# Altium PCB bbr18_ball_sensor_board.PcbDoc
Units mm, origin at the board's own origin, x right, y up, seen from the top; angles counter-clockwise.
Board outline 44.8 x 54.86 mm, 2 copper layers (Top Layer, Bottom Layer), stack 1.571 mm thick; 5 components, 6 nets, 22 pads, 4 vias.
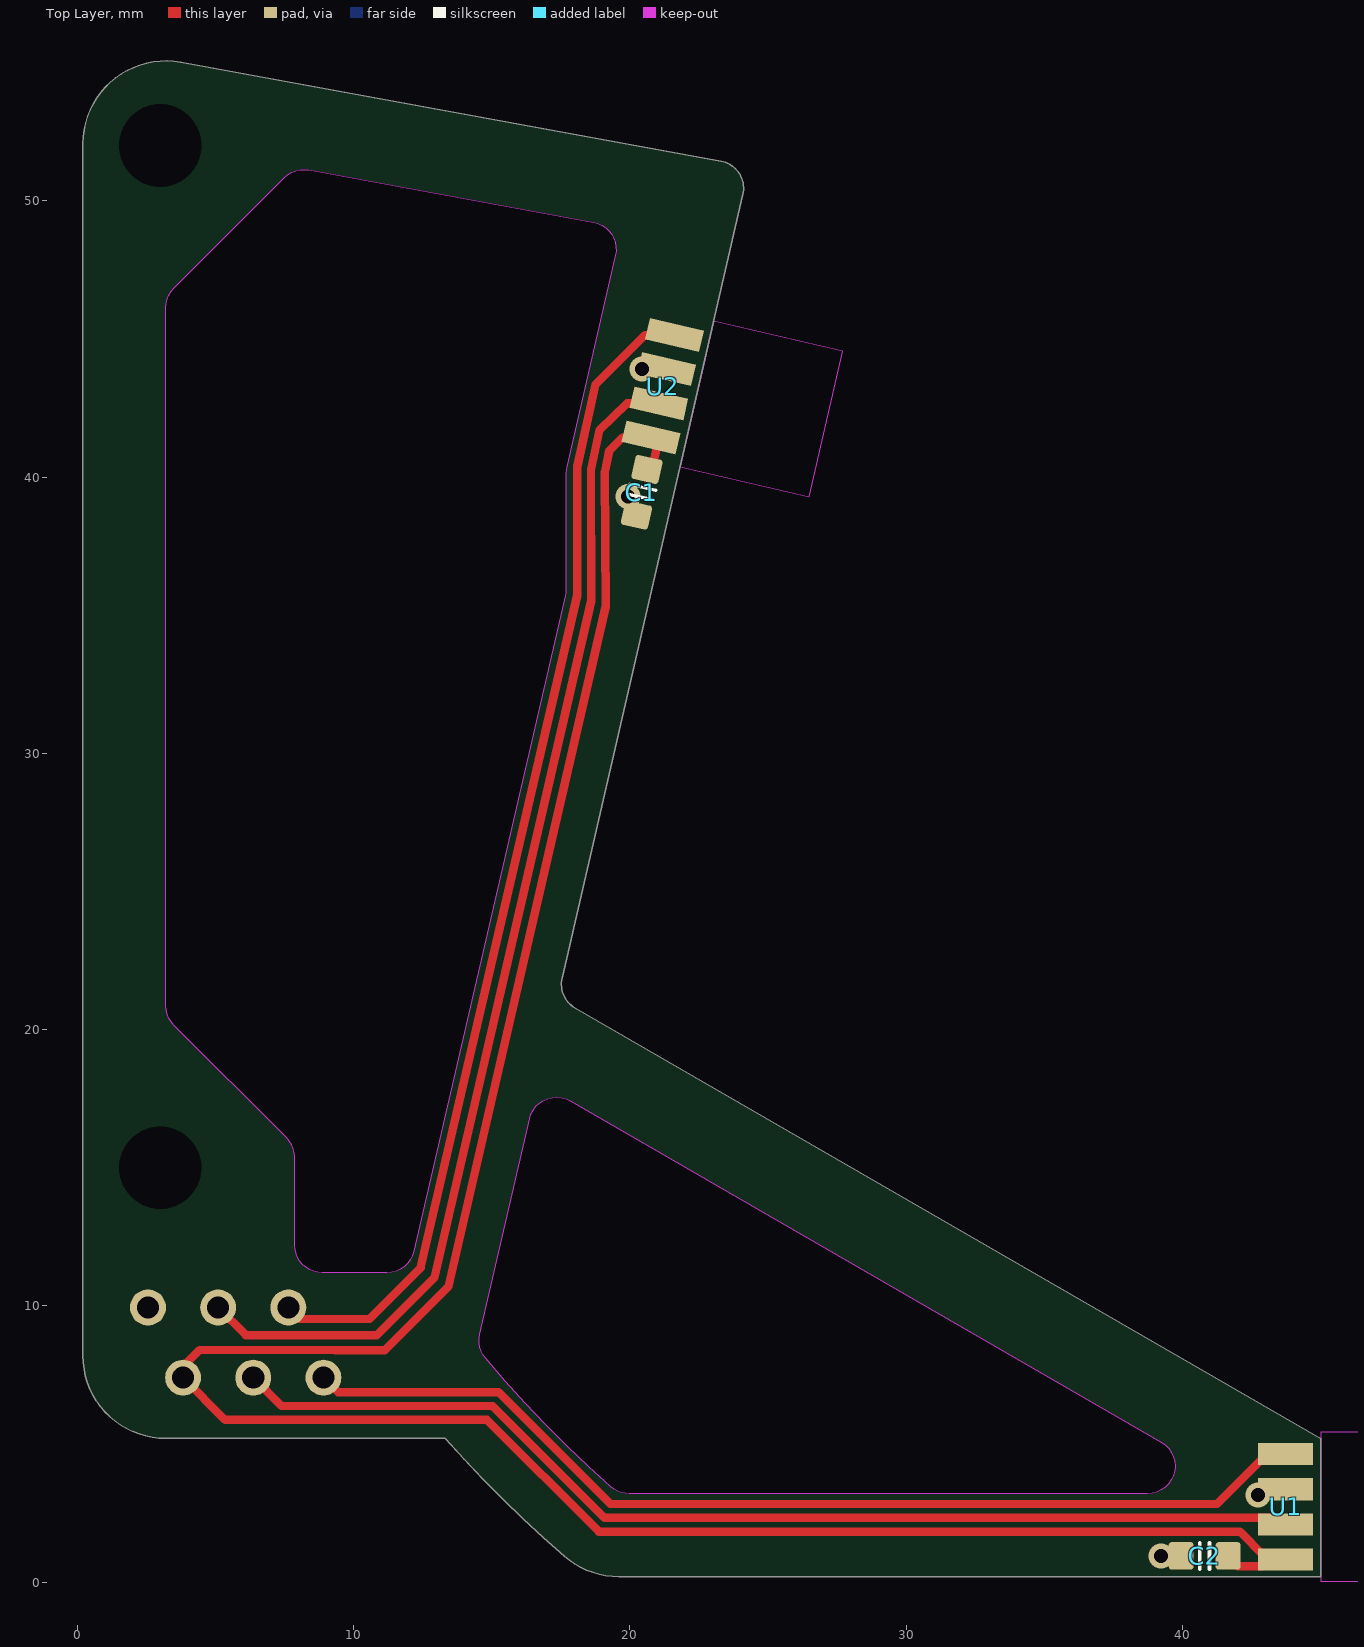
[diagram p0: Top Layer view]
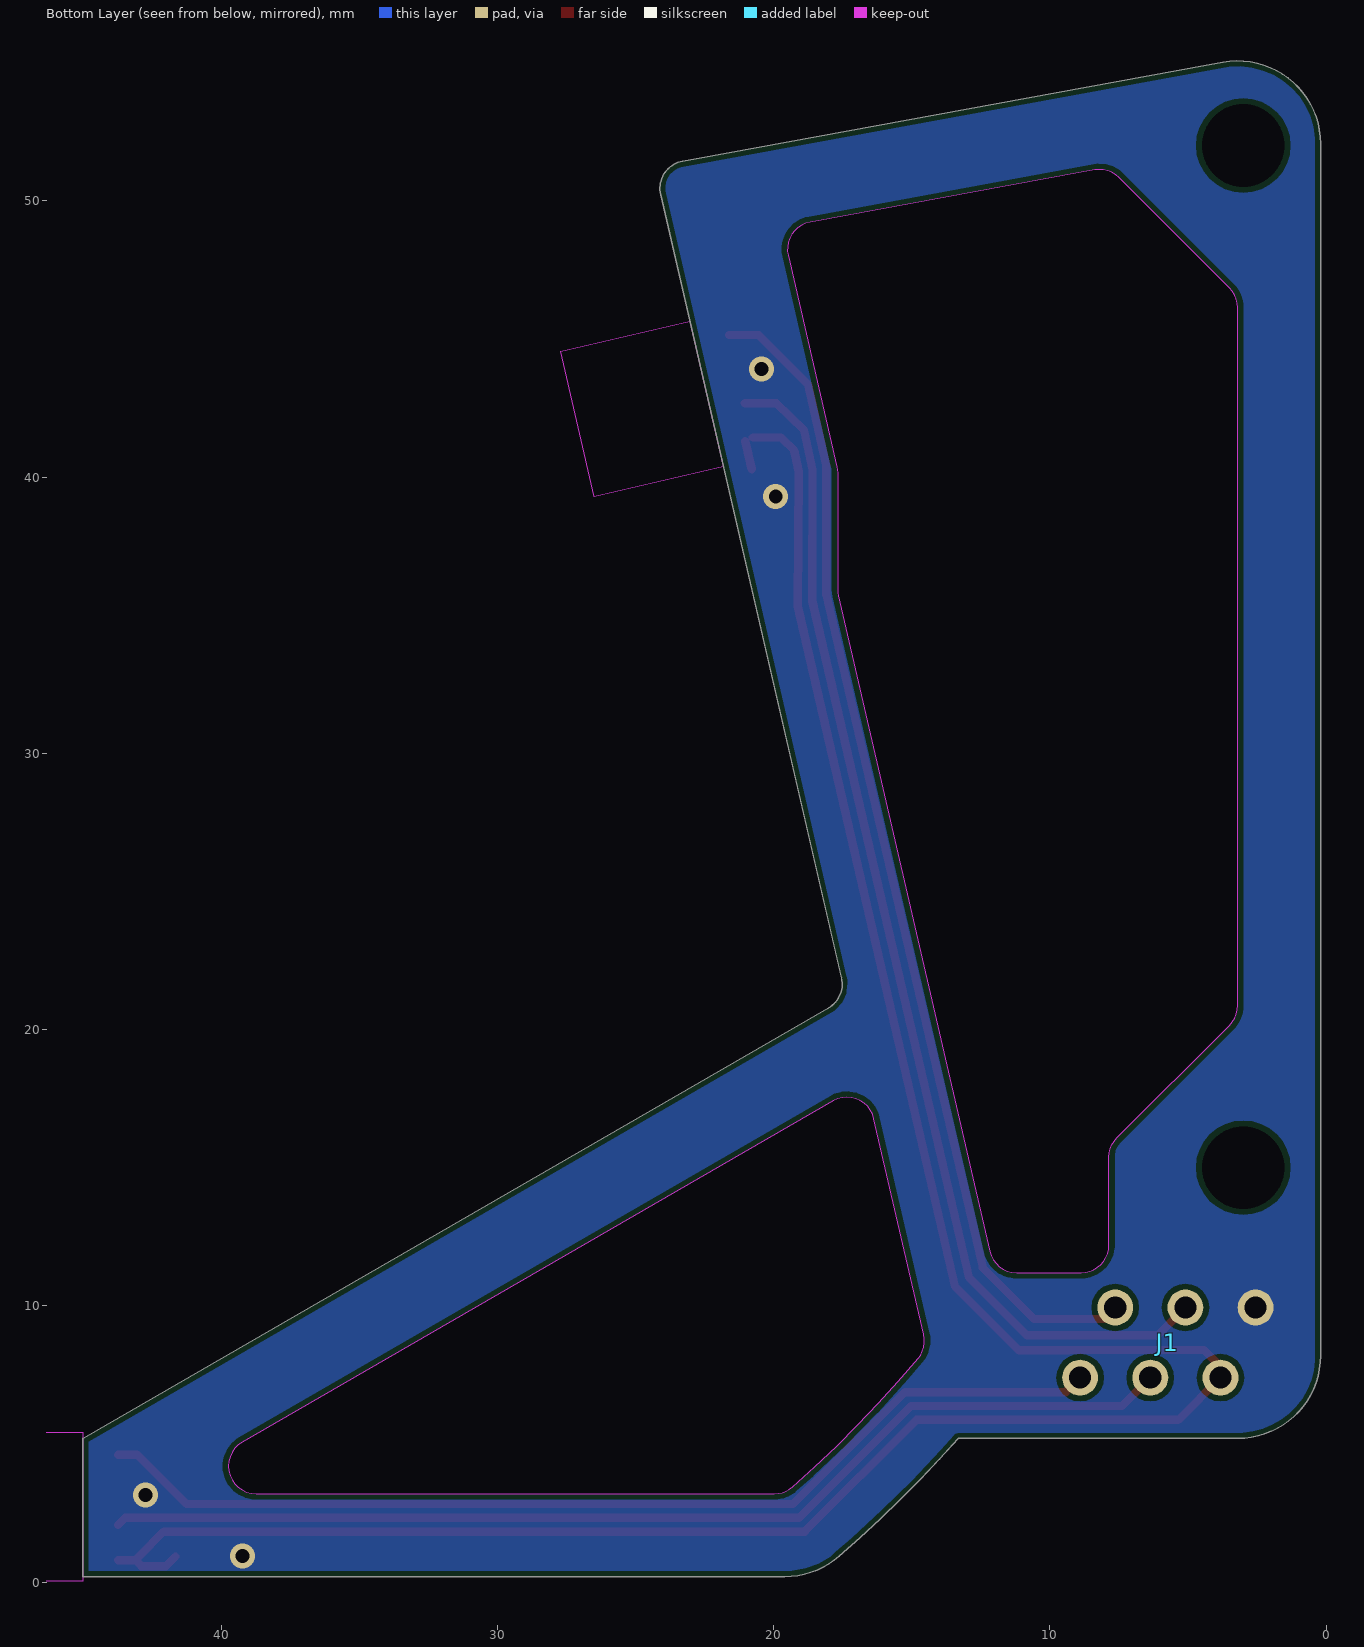
[diagram p1: Bottom Layer view, seen from below]
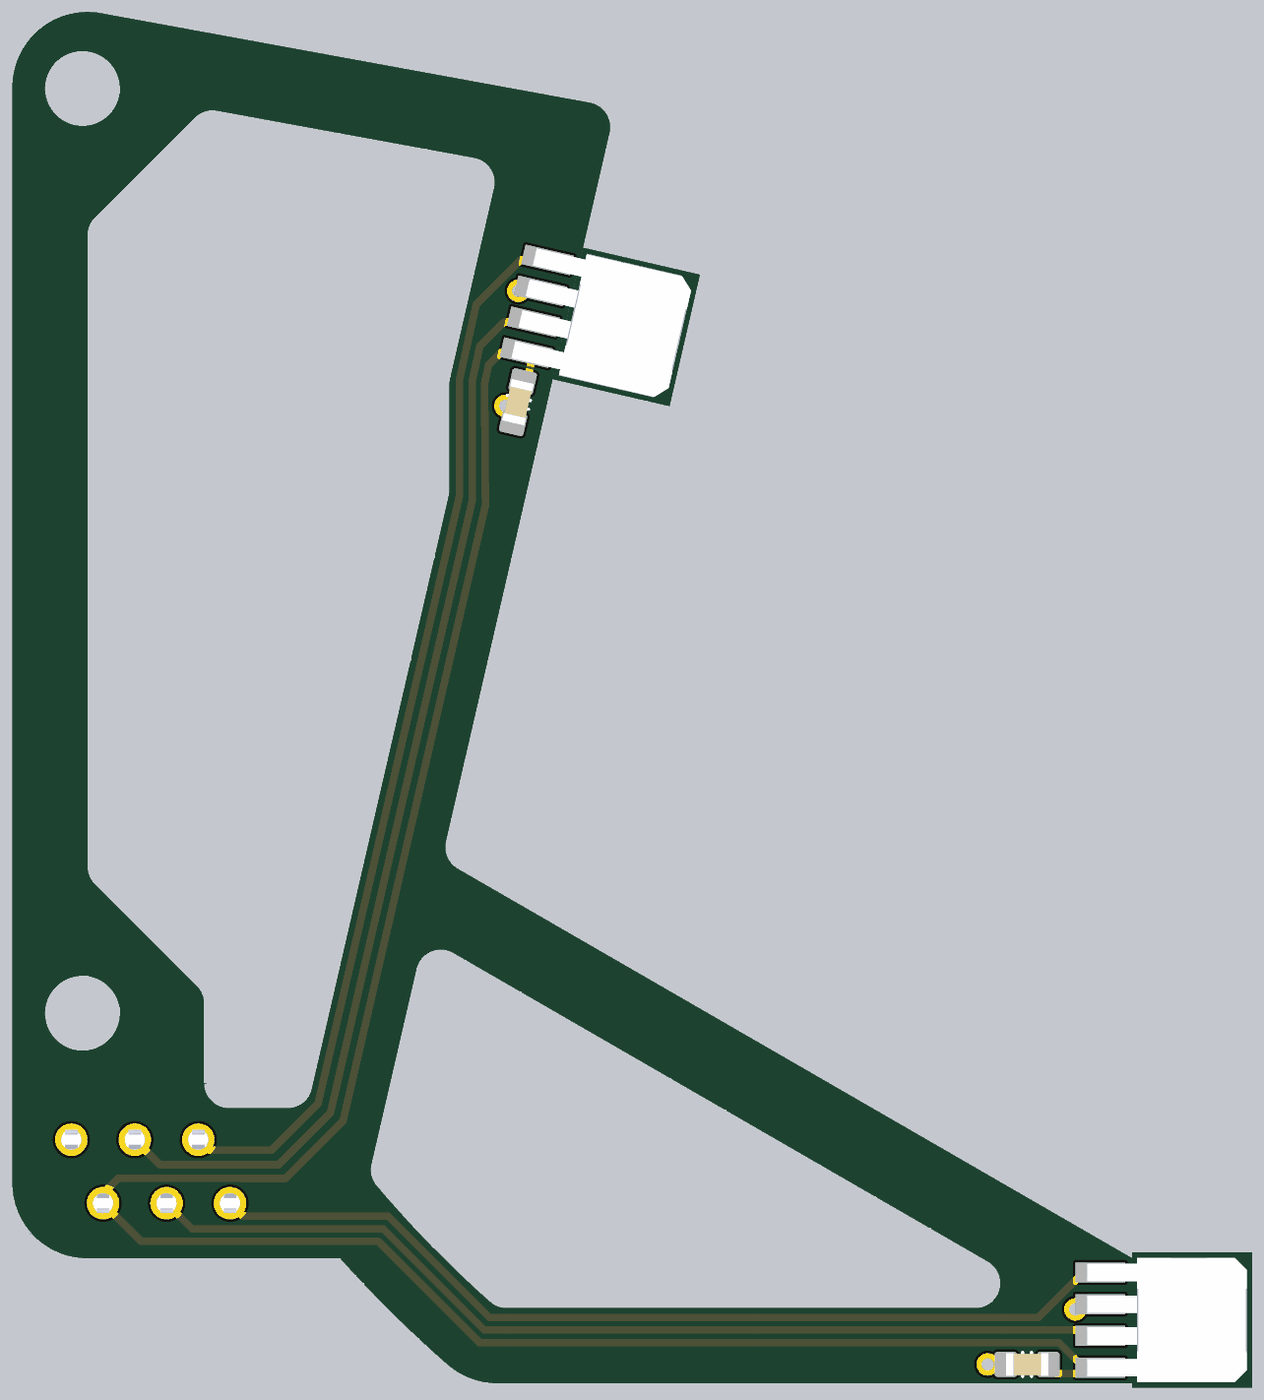
[diagram p2: 3D render of the assembled board from above, using the file's embedded part models]

## Layer stack, top to bottom
Top Solder: solder mask 0.0102, Solder Resist, Dk 3.5
Top Layer: signal copper 0.0356
Dielectric 1: dielectric 1.5, FR-4, Dk 4.8
Bottom Layer: signal copper 0.0356
Bottom Solder: solder mask 0.0102, Solder Resist, Dk 3.5

## Board outline
3.2,5.2 cw(c3.2,8.2) 0.2,8.2 0.2,52.061 cw(c3.2,52.061) 3.74,55.012 23.294,51.433 cw(c23.114,50.449) 24.088,50.224 17.542,21.87 ccw(c18.517,21.645) 18.017,20.779 45,5.2 45,0.2 19.596,0.2 cw(c19.596,3.2) 17.627,0.937 cw(c49,37) 13.312,5.2
cut-out: 14.773,8.094 cw(c15.537,8.739) 14.563,8.964 16.366,16.775 cw(c17.34,16.55) 17.84,17.416 39.232,5.066 cw(c38.732,4.2) 38.732,3.2 19.972,3.2 cw(c19.972,4.2) 19.31,3.451 cw(c49,37)
cut-out: 7.864,15.378 ccw(c6.864,15.378) 7.571,16.085 3.493,20.164 cw(c4.2,20.871) 3.2,20.871 3.2,46.129 cw(c4.2,46.129) 3.493,46.836 7.493,50.836 cw(c8.2,50.129) 8.38,51.113 18.68,49.228 cw(c18.5,48.244) 19.474,48.019 17.708,40.372 ccw(c18.683,40.147) 17.683,40.147 17.683,35.929 cw(c16.683,35.929) 17.657,35.704 12.179,11.975 cw(c11.205,12.2) 11.205,11.2 8.864,11.2 cw(c8.864,12.2) 7.864,12.2

## Design rules (kind name [scope] priority, off if disabled: settings)
BoardOutlineClearance [All] p1: gap=0.2 ignorepadtopadclearanceinfootprint=FALSE except(0: Arc-SplitContinuation Track-SplitContinuation SMDPad-SplitContinuation THPad-SplitContinuation Via-SplitContinuation Fill-SplitContinuation Poly-SplitContinuation Region-SplitContinuation Text-SplitContinuation)
Clearance ClearanceKeepOut [All vs OnLayer('Keep-Out Layer')] p1: gap=0.1 ignorepadtopadclearanceinfootprint=FALSE
Clearance [All] p2: gap=0.2 ignorepadtopadclearanceinfootprint=FALSE
ComponentClearance NetTieClearance [HasFootprint('NET-TIE-0602')] p1: gap=0 collisioncheckmode=3 verticalgap=0 showdistances=FALSE
ComponentClearance [All] p2: gap=0.2 collisioncheckmode=3 verticalgap=0.2 showdistances=FALSE
DiffPairsRouting [All] p1: maxlimit=0.3 minlimit=0.2 mostfreqgap=0.2 toplayer_minwidth=0.2 toplayer_maxwidth=1 toplayer_prefwidth=0.3 bottomlayer_minwidth=0.2 bottomlayer_maxwidth=1 bottomlayer_prefwidth=0.3 maxuncoupledlength=12.7
HoleSize [All] p1: absolutevalues=TRUE maxlimit=5 minlimit=0.3 maxpercent=80.000 minpercent=20.000
HoleToHoleClearance [All] p1: gap=0.2 allowstackedmicrovias=TRUE
MinimumSolderMaskSliver [All] p1: minsoldermaskwidth=0.2
PolygonConnect DirectConnectPolygons [All vs IsNamedPolygon('Power 16V') or IsNamedPolygon('Power GND') or IsNamedPolygon('Driver 16V') or InNet('SL_A') or InNet('SL_B') or InNet('SL_C') or InNet('MOT_A') or InNet('MOT_B') or InNet('MOT_C') or InNet('BAT_GND') or InNet('16V') or InNet('SLA_SHUNT') or InNet('SLB_SHUNT') or InNet('SLC_SHUNT')] p1: connectstyle=Direct reliefconductorwidth=0.254 reliefentries=4 polygonreliefangle="90 Angle" airgapwidth=0.254
PolygonConnect [All] p2: connectstyle=Direct reliefconductorwidth=0.254 reliefentries=4 polygonreliefangle="90 Angle" airgapwidth=0.254
RoomDefinition bbr18_ball_sensor_board [InComponentClass('bbr18_ball_sensor_board')] p1: confinementstyle=ConfineIn formatcopy=TRUE lockcomponents=FALSE outline -25.4,-25.4 72.15,-25.4 72.15,74.075 -25.4,74.075
RoutingVias [All] p1: holewidth=0.3 width=0.6 viastyle="Through Hole" minholewidth=0.3 minwidth=0.6 maxholewidth=2 maxwidth=3
SolderMaskExpansion SolderMaskExpansionVia [IsVia And (Not IsTestpoint)] p1: expansion=-5
SolderMaskExpansion [All] p2: expansion=0.1
Width [All] p1: maxlimit=5 minlimit=0.2 preferedwidth=0.3
25 further rules are at their usual default settings.

## Classes and differential pairs
component class bbr18_ball_sensor_board: C1 J1 U1 U2

## Components (designator, comment, footprint, x,y, rotation, side; value= is the part's Value field where it differs from the comment)
C1 "approved sub OK" CAPC1608X90N 20.425,39.45 r257 top value=100n
C2 "approved sub OK" CAPC1608X90N 40.8,0.95 r180 top value=100n
J1 "HEADER-6" MICRO-MATCH-MOB-06 8.905,7.4 r180 bottom
U1 "IS471F" IS471F 45,2.725 r180 top
U2 "IS471F" IS471F 22.425,43 r167 top

## Footprints (in the part's own frame and the unit in brackets; to place one, negate y for a bottom-side part, rotate by r counter-clockwise, add the part's x,y. Pads: shape width x height; smd on the part's side, far side on the other; paste and mask are expansions set on the pad)
CAPC1608X90N [mm] "Chip Capacitor, Body 1.6x0.8mm, EIA 0603, IPC Medium Density"
  round 0.254 on Mech15: 0(0,0)
  rrect25% 0.9x1 smd: 1(-0.85,0) 2(0.85,0)
  Top Layer pour cut-out: -0.6,0.5 -0.4,0.7 0.4,0.7 0.6,0.5 0.6,-0.5 0.4,-0.7 -0.4,-0.7 -0.6,-0.5
  silkscreen extent -0.18,-0.48 0.18,0.48, body extent -0.85,-0.45 0.85,0.45, height 0.89
IS471F [mm]
  rect 2x0.8 smd: 1(1.27,1.905) 2(1.27,0.635) 3(1.27,-0.635) 4(1.27,-1.905)
  Keep-Out Layer board cut-out: -4.8,2.7 -4.8,-2.7 0,-2.7 0,2.7
  body extent -4.6,-2.5 1.8,2.5, height 1.56
MICRO-MATCH-MOB-06 [mm]
  round 1.3 hole 0.8: 1(0,0) 2(1.27,2.54) 3(2.54,0) 4(3.81,2.54) 5(5.08,0) 6(6.35,2.54)
  body extent -2.22,-1.23 8.58,3.77, height 6.9

## Part data
C1 C2: library part CAPC_100n_0603_X7R_50V_10%, "Capacitor SMD Cer 100nF 10% 50V X7R 0603", Manufacturer 1="AVX Corporation", Manufacturer 2="TDK Corporation", Manufacturer Part Number 1=06035C104KAT2A, Manufacturer Part Number 2=C1608X7R1H104K, Package / Case="0603 (1608 Metric)", Ratings="50V; X7R", Supplier Part Number 1=478-5052-1-ND, Tolerance=±10%, ComponentLink1Description=http://www.avx.com/docs/Catalogs/cx7r.pdf, ComponentLink1URL=http://www.avx.com/docs/Catalogs/cx7r.pdf, ComponentLink2Description=http://product.tdk.com/capacitor/mlcc/en/documents/mlcc_commercial_general_en.pdf, ComponentLink2URL=http://product.tdk.com/capacitor/mlcc/en/documents/mlcc_commercial_general_en.pdf, Material=ceramic, SCDType=spec, Supplier 1=Digi-Key, Supplier 2=Digi-Key, Supplier Part Number 2=445-1314-1-ND

## Free pads (board coordinates)
  round 0 hole 3 unplated: 3(3,15) 4(3,52)

## Via types
v1: diameter 0.9, hole 0.5, Top Layer to Bottom Layer, 4 vias

## Nets (pads, with @x,y where several pads share a name; then routed paths per layer and width w, separated by ;. In a path a pad name is that pad's centre, name@x,y a point inside that pad or via, vN(x,y) a via of type N, cw(c..) or ccw(c..) an arc to the next point about the centre after c; other vN are vias at no path point)
5V: C1.1 C2.1 J1.5 U1.1 U2.1 | length 89
  Top Layer w0.3: U2.1 19.73,41.43 19.251,40.951 19.091,40.195 19.125,35.325 13.429,10.699 11.12,8.391 9.328,8.391 9.319,8.4 4.425,8.4 3.825,7.8 J1.5 5.35,5.875 14.825,5.875 18.875,1.825 42.075,1.825 U1.1@42.975,0.925 ; C1.1@20.791,40.278 U2.1@21.025,41.3 ; C2.1@41.65,0.925 42,0.575 42.885,0.575 43.105,0.795 U1.1@43.73,0.795
GND: C1.2 C2.2 J1.6 U1.3 U2.3
  other v1: 39.225,0.95 42.73,3.15 19.925,39.3 20.442,43.904
LED1: J1.1 U1.4 | length 37.5
  Top Layer w0.3: J1.1 9.43,6.875 15.239,6.875 19.289,2.825 41.25,2.825 43.03,4.605 U1.4@43.73,4.605
LED2: J1.2 U2.4 | length 42
  Top Layer w0.3: J1.2 8.05,9.525 10.575,9.525 12.425,11.375 18.091,35.716 18.091,40.372 18.757,43.357 20.542,45.142 U2.4
OUT1: J1.3 U1.2 | length 39.6
  Top Layer w0.3: J1.3 7.39,6.375 15.032,6.375 19.082,2.325 43.47,2.325 U1.2@43.73,2.065
OUT2: J1.4 U2.2 | length 43
  Top Layer w0.3: J1.4 6.095,8.94 10.84,8.94 12.925,11.025 18.6,35.525 18.591,40.274 18.905,41.704 19.892,42.667 U2.2
pads on no net: C1.0 C2.0

## Polygon pours and split planes (outlines as drawn)
GND on Bottom Layer "Bottom Layer-GND" (solid, remove dead copper, pour order 0): 0,0 0,57 47,57 47,0

## Other copper
Top Layer:
  pour cut-out: 3,50.5 cw(c3,52) 1.5,52 cw(c3,52) 3,53.5 cw(c3,52) 4.5,52 cw(c3,52)

## Silkscreen, mask and mechanical layers (free items; w line width, h text height)
Mechanical 1:
  lines w0.1: 0.2,8.2 ccw(c3.2,8.2) 3.2,5.2 13.312,5.2 ccw(c49,37) 17.627,0.937 ccw(c19.596,3.2) 19.596,0.2 45,0.2 45,5.2 18.017,20.779 cw(c18.517,21.645) 17.542,21.87 24.088,50.224 ccw(c23.114,50.449) 23.294,51.433 3.74,55.012 ccw(c3.2,52.061) 0.2,52.061 0.2,8.2 ; 3.2,20.871 ccw(c4.2,20.871) 3.493,20.164 7.571,16.085 cw(c6.864,15.378) 7.864,15.378 7.864,12.2 ccw(c8.864,12.2) 8.864,11.2 11.205,11.2 ccw(c11.205,12.2) 12.179,11.975 17.657,35.704 ccw(c16.683,35.929) 17.683,35.929 17.683,40.147 cw(c18.683,40.147) 17.708,40.372 19.474,48.019 ccw(c18.5,48.244) 18.68,49.228 8.38,51.113 ccw(c8.2,50.129) 7.493,50.836 3.493,46.836 ccw(c4.2,46.129) 3.2,46.129 3.2,20.871 ; 14.563,8.964 ccw(c15.537,8.739) 14.773,8.094 ccw(c49,37) 19.31,3.451 ccw(c19.972,4.2) 19.972,3.2 38.732,3.2 ccw(c38.732,4.2) 39.232,5.066 17.84,17.416 ccw(c17.34,16.55) 16.366,16.775 14.563,8.964